# EAGLE board FlashPanelV6_0 (EAGLE 7.3.0)
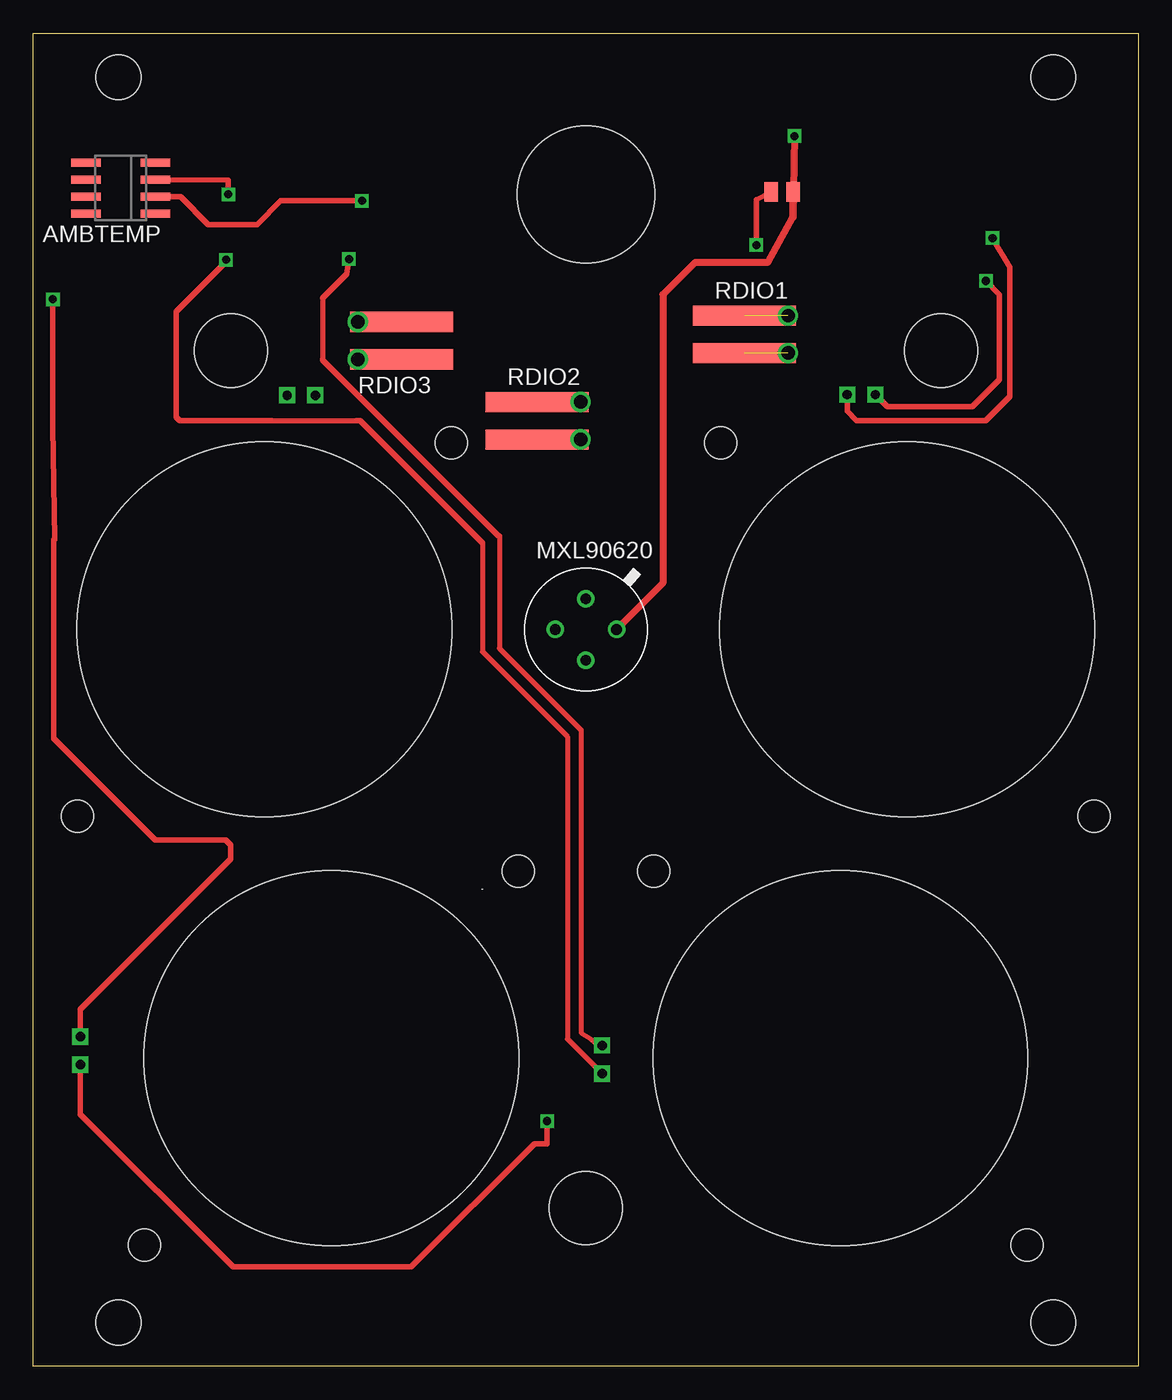
[diagram p0: board, top side]
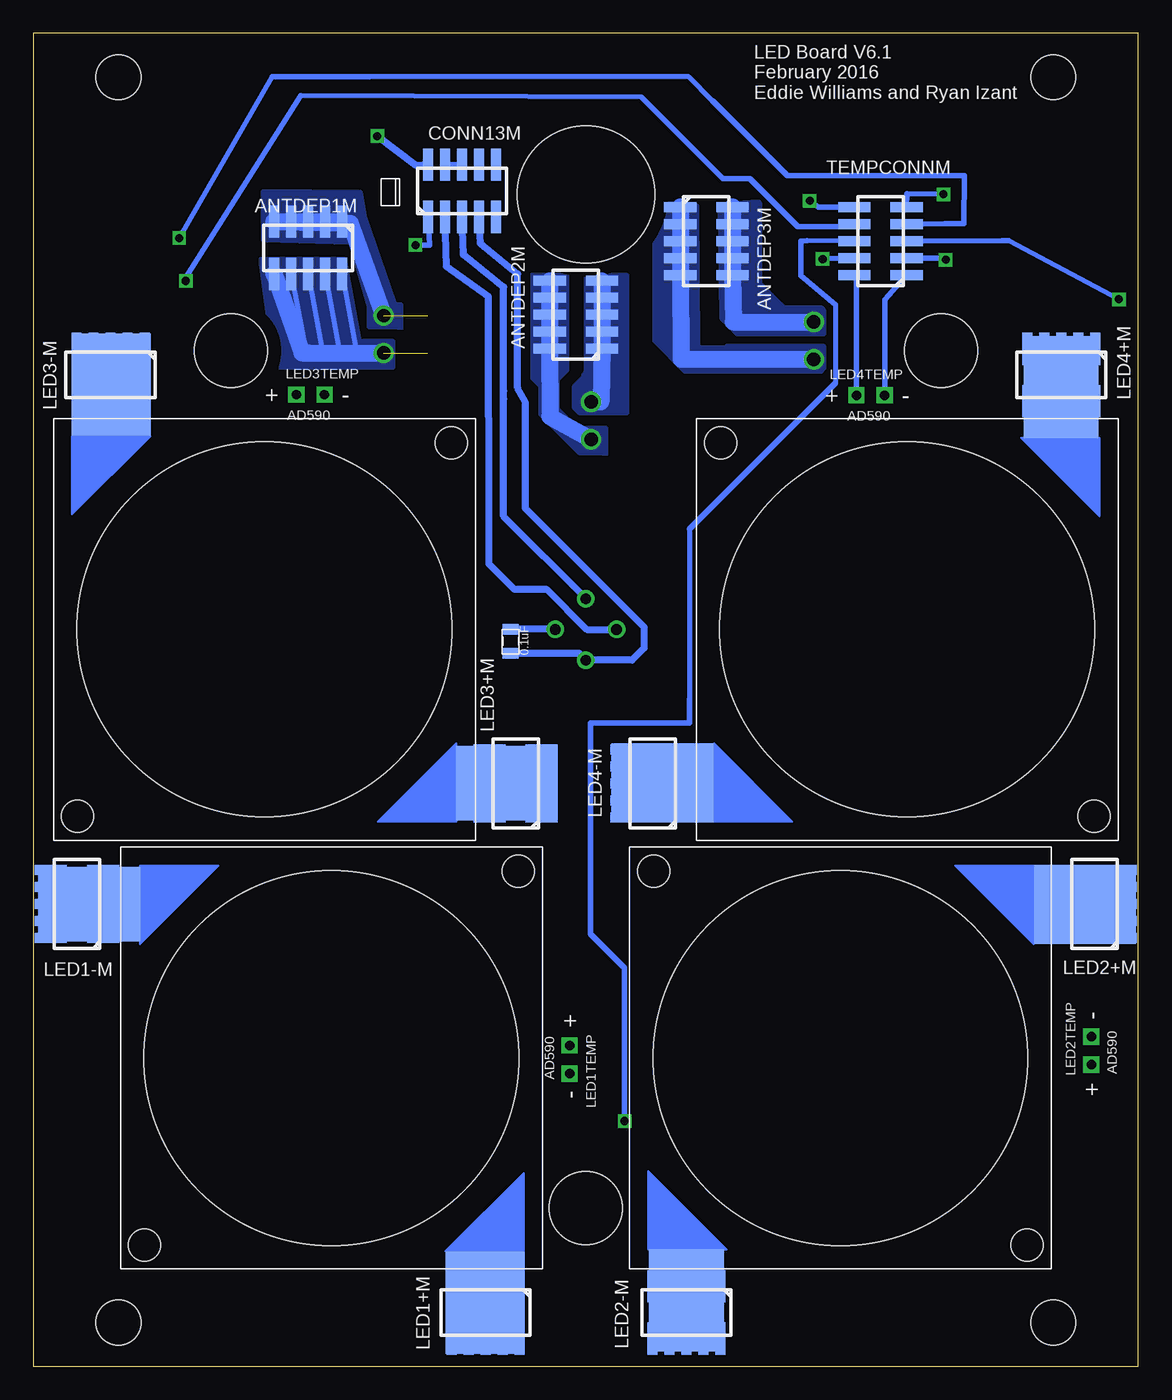
[diagram p1: board, bottom side, seen from below]

Size 82.5 x 99.5 mm. Coordinates in mm from the lower left corner, seen from the top.
Outline: 0,0 0,99.5 82.5,99.5 82.5,0 0,0
Copper layers (1*16): Top 0.035mm / dielectric 1.5mm / Bottom 0.035mm
Design rules "default": minimum track width 10mil, minimum drill 24mil, track to track 8mil, track to pad 8mil, pad to pad 8mil, via to via 8mil, smd to smd 8mil, copper to edge 40mil, drill to drill 8mil, minimum pad ring 10mil, minimum via ring 8mil, stop-mask expansion 4mil, vias tented up to drill 0mil, thermal gap 10mil
Holes 3.35 mm at 76.15,3.25 76.15,96.24 6.35,96.24 6.35,3.25
Holes 5.46 mm at 41.25,11.81 67.77,75.82 14.73,75.82
Holes 10.26 mm at 41.25,87.48

## Footprints (pad centres in the part's own frame; a part is rotated, then mirrored left to right if it is on the bottom)
8SOIC = smd 0.6 x 2.2: 1 -1.905,-2.6; 2 -0.635,-2.6; 3 0.635,-2.6; 4 1.905,-2.6; 5 1.905,2.6; 6 0.635,2.6; 7 -0.635,2.6; 8 -1.905,2.6
10PINMALE = smd 0.74 x 2.4: P1 -2.54,-1.95; P2 -1.27,-1.95; P3 0,-1.95; P4 1.27,-1.95; P5 2.54,-1.95; P6 2.54,1.95; P7 1.27,1.95; P8 0,1.95; P9 -1.27,1.95; P10 -2.54,1.95
0805 = smd 0.8 x 1.2: 1 -0.9,0; 2 0.9,0
CXM27 = smd 7.6 x 5.588: ANODE -18.097,11.481 | smd 5.893 x 7.6: CATHODE 11.455,-18.271 | hole 27.991: 0,0 | hole 2.4: 13.95,13.95; -13.95,-13.95
AD590TH = drill 0.7 square: P$1 -2.1,0; P$2 0,0
RDIO_DPLY = smd 1.5 x 7.714 bottom: P1 -2.8,-3.26; P4 0,-3.26 | drill 1: P2 -2.794,0; P3 0,0
MXL90620 = drill 0.8: SCL 2.293,0; VDD -2.293,0; VSS 0,-2.294 | drill 0.8 pad 1.2: SDA 0,2.294
PHOTODETECTBOTTOM = smd 1 x 1.45 bottom: GND 0.76,0.4; PWROUT -0.88,0.4

## Placement (x,y rotation side)
AMBTEMP  AD590  [8SOIC]  6.52,87.96 90 top
ANTDEP1M  [10PINMALE]  62,83.5 180 bottom
ANTDEP2M  [10PINMALE]  42,78.5 90 bottom
ANTDEP3M  [10PINMALE]  32.25,84 270 bottom
C1  0.1uF  [0805]  46.87,54.11 270 bottom
CONN13M  [10PINMALE]  50.5,87.75 0 bottom
LED1  [CXM27]  60.25,23 0 bottom
LED1+M  [10PINMALE]  48.75,4 180 bottom
LED1-M  [10PINMALE]  79.25,34.5 90 bottom
LED1TEMP  AD590-TH  [AD590TH]  42.46,21.84 270 bottom
LED2  [CXM27]  22.25,23 90 bottom
LED2+M  [10PINMALE]  3.25,34.5 90 bottom
LED2-M  [10PINMALE]  33.75,4 180 bottom
LED2TEMP  AD590-TH  [AD590TH]  3.5,24.6 90 bottom
LED3  [CXM27]  65.25,55 180 bottom
LED3+M  [10PINMALE]  46.5,43.5 90 bottom
LED3-M  [10PINMALE]  76.75,74 180 bottom
LED3TEMP  AD590-TH  [AD590TH]  60.77,72.54 0 bottom
LED4  [CXM27]  17.25,55 270 bottom
LED4+M  [10PINMALE]  5.75,74 180 bottom
LED4-M  [10PINMALE]  36.25,43.5 90 bottom
LED4TEMP  AD590-TH  [AD590TH]  18.94,72.49 0 bottom
RDIO1  RDIO  [RDIO_DPLY]  56.35,78.43 90 bottom
RDIO2  RDIO  [RDIO_DPLY]  40.86,71.99 90 bottom
RDIO3  RDIO  [RDIO_DPLY]  24.23,75.17 270 bottom
TEMPCONNM  [10PINMALE]  19.25,84 90 bottom
U$1  MXL90620  [MXL90620]  41.25,55 90 top
U$2  PHOTODETECTBOTTOM  [PHOTODETECTBOTTOM]  55.96,88.06 180 bottom

## Library data of the parts
AMBTEMP C1 LED1TEMP LED2TEMP LED3TEMP LED4TEMP U$1 = CNTRL_BOARD
ANTDEP1M ANTDEP2M ANTDEP3M CONN13M LED1 LED1+M LED1-M LED2 LED2+M LED2-M LED3 LED3+M LED3-M LED4 LED4+M LED4-M TEMPCONNM = cxm27
RDIO1-RDIO3 = rdio_deploy
U$2 = solarcellnew

## Nets
3V3: C1.2 CONN13M.P4 U$1.VDD
GND: C1.1 CONN13M.P10 U$1.VSS U$2.GND
N$1: LED3+M.P1 LED3+M.P2 LED3+M.P3 LED3+M.P4 LED3+M.P5 LED3+M.P6 LED3+M.P7 LED3+M.P8 LED3+M.P9 LED3+M.P10 LED3.ANODE
N$2: LED3-M.P1 LED3-M.P2 LED3-M.P3 LED3-M.P4 LED3-M.P5 LED3-M.P6 LED3-M.P7 LED3-M.P8 LED3-M.P9 LED3-M.P10 LED3.CATHODE
N$3: LED2+M.P1 LED2+M.P2 LED2+M.P3 LED2+M.P4 LED2+M.P5 LED2+M.P6 LED2+M.P7 LED2+M.P8 LED2+M.P9 LED2+M.P10 LED2.CATHODE
N$4: LED2-M.P1 LED2-M.P2 LED2-M.P3 LED2-M.P4 LED2-M.P5 LED2-M.P6 LED2-M.P7 LED2-M.P8 LED2-M.P9 LED2-M.P10 LED2.ANODE
N$5: LED1+M.P1 LED1+M.P2 LED1+M.P3 LED1+M.P4 LED1+M.P5 LED1+M.P6 LED1+M.P7 LED1+M.P8 LED1+M.P9 LED1+M.P10 LED1.CATHODE
N$6: LED1-M.P1 LED1-M.P2 LED1-M.P3 LED1-M.P4 LED1-M.P5 LED1-M.P6 LED1-M.P7 LED1-M.P8 LED1-M.P9 LED1-M.P10 LED1.ANODE
N$7: LED4-M.P1 LED4-M.P2 LED4-M.P3 LED4-M.P4 LED4-M.P5 LED4-M.P6 LED4-M.P7 LED4-M.P8 LED4-M.P9 LED4-M.P10 LED4.CATHODE
N$8: LED4+M.P1 LED4+M.P2 LED4+M.P3 LED4+M.P4 LED4+M.P5 LED4+M.P6 LED4+M.P7 LED4+M.P8 LED4+M.P9 LED4+M.P10 LED4.ANODE
N$10: ANTDEP1M.P1 ANTDEP1M.P2 ANTDEP1M.P3 ANTDEP1M.P4 ANTDEP1M.P5 RDIO1.P3 RDIO1.P4
N$11: ANTDEP2M.P6 ANTDEP2M.P7 ANTDEP2M.P8 ANTDEP2M.P9 ANTDEP2M.P10 RDIO2.P1 RDIO2.P2
N$12: ANTDEP2M.P1 ANTDEP2M.P2 ANTDEP2M.P3 ANTDEP2M.P4 ANTDEP2M.P5 RDIO2.P3 RDIO2.P4
N$13: ANTDEP3M.P6 ANTDEP3M.P7 ANTDEP3M.P8 ANTDEP3M.P9 ANTDEP3M.P10 RDIO3.P1 RDIO3.P2
N$14: ANTDEP3M.P1 ANTDEP3M.P2 ANTDEP3M.P3 ANTDEP3M.P4 ANTDEP3M.P5 RDIO3.P3 RDIO3.P4
N$15: LED4TEMP.P$2 TEMPCONNM.P1
N$16: LED1TEMP.P$2 TEMPCONNM.P2
N$20: LED2TEMP.P$2 TEMPCONNM.P3
N$21: LED3TEMP.P$2 TEMPCONNM.P4
N$22: LED4TEMP.P$1 TEMPCONNM.P10
N$23: LED1TEMP.P$1 TEMPCONNM.P9
N$24: LED2TEMP.P$1 TEMPCONNM.P8
N$25: LED3TEMP.P$1 TEMPCONNM.P7
N$26: AMBTEMP.3 TEMPCONNM.P5
N$27: AMBTEMP.2 TEMPCONNM.P6
PDOUT: CONN13M.P1 U$2.PWROUT
RDIO1: ANTDEP1M.P6 ANTDEP1M.P7 ANTDEP1M.P8 ANTDEP1M.P9 ANTDEP1M.P10 RDIO1.P1 RDIO1.P2
SCL: CONN13M.P3 U$1.SCL
SDA: CONN13M.P2 U$1.SDA
TEST: CONN13M.P8 CONN13M.P9

## Tracks (layer width: path | path; a pad name or v marks a point on that pad's centre or on a via)
3V3
  Bottom 0.508: CONN13M.P4 49.12,83.82 46.34,81.53 46.34,73.03 45.77,71.96 45.77,64.03 36.9,55.16 36.9,53.6 37.79,52.71 U$1.VDD 41.76,53.21 C1.2
GND  (via drill 0.6)
  Top 0.508: v56.84,91.84 56.72,85.78 U$2.GND 56.72,85.78 54.84,82.4 49.4,82.4 47,80 47,58.46 U$1.VSS
  Bottom 0.508: CONN13M.P10 53.92,89.63 v56.84,91.84 | U$1.VSS 43.56,55.01 C1.1
N$1
  Bottom 0.406: LED3+M.P6 LED3+M.P7 LED3+M.P8 | LED3+M.P8 LED3+M.P9 LED3+M.P10 | LED3+M.P8 LED3+M.P3 | LED3+M.P8 46.67,43.5 46.48,43.69 46.98,43.69 LED3.ANODE | LED3+M.P5 LED3+M.P4 LED3+M.P3 | LED3+M.P3 44.55,43.08 44.96,42.67 44.96,42.64 LED3+M.P2 LED3+M.P1
N$2
  Bottom 0.406: LED3-M.P1 LED3-M.P2 LED3-M.P3 | LED3-M.P3 LED3-M.P4 LED3-M.P5 | LED3-M.P3 76.75,73.32 LED3.CATHODE 76.7,72.09 LED3-M.P8 | LED3-M.P8 LED3-M.P9 LED3-M.P10 | LED3-M.P8 LED3-M.P7 LED3-M.P6
N$3
  Bottom 0.406: LED2+M.P6 LED2+M.P7 LED2+M.P8 | LED2+M.P8 LED2+M.P9 LED2+M.P10 | LED2+M.P8 4.02,34.5 LED2.CATHODE 3.93,34.5 LED2+M.P3 | LED2+M.P5 LED2+M.P4 LED2+M.P3 | LED2+M.P3 LED2+M.P2 LED2+M.P1
N$4
  Bottom 0.406: LED2-M.P5 LED2-M.P4 LED2-M.P3 | LED2-M.P3 LED2-M.P2 LED2-M.P1 | LED2-M.P3 33.75,4.92 LED2.ANODE 33.73,2.07 | 33.73,2.07 LED2-M.P8 LED2-M.P7 LED2-M.P6 | 33.73,2.07 32.5,2.07 LED2-M.P9 LED2-M.P10
N$5
  Bottom 0.406: LED1+M.P6 LED1+M.P7 LED1+M.P8 | LED1+M.P8 48.75,4.68 LED1.CATHODE 48.8,5.91 LED1+M.P3 | 47.73,2.05 LED1+M.P9 LED1+M.P10 | 47.73,2.05 47.75,2.03 | 47.73,2.05 47.5,2.29 47.5,2.03 48.73,2.03 LED1+M.P8 | LED1+M.P3 LED1+M.P2 LED1+M.P1 | LED1+M.P3 LED1+M.P4 LED1+M.P5
N$6
  Bottom 0.406: LED1-M.P1 LED1-M.P2 LED1-M.P3 | LED1-M.P5 LED1-M.P4 LED1-M.P3 | LED1-M.P3 78.33,34.5 LED1.ANODE 81.18,34.48 LED1-M.P8 | LED1-M.P8 LED1-M.P7 LED1-M.P6 | LED1-M.P8 LED1-M.P9 LED1-M.P10
N$7
  Bottom 0.406: LED4-M.P10 LED4-M.P9 LED4-M.P8 | LED4-M.P8 LED4-M.P7 LED4-M.P6 | LED4-M.P8 36.64,43.5 36.58,43.43 35.81,43.43 | 35.81,43.43 35.63,43.43 | 35.63,43.43 LED4.CATHODE 35.7,43.55 35.81,43.43 | 35.63,43.43 35.31,43.43 35.05,43.69 34.49,43.69 LED4-M.P3 | LED4-M.P3 LED4-M.P4 LED4-M.P5 | LED4-M.P3 LED4-M.P2 LED4-M.P1
N$8
  Bottom 0.406: LED4+M.P5 LED4+M.P4 LED4+M.P3 | LED4+M.P3 LED4+M.P2 LED4+M.P1 | LED4+M.P3 5.75,74.26 5.84,74.17 5.84,73.17 LED4.ANODE 5.77,72.07 LED4+M.P8 | LED4+M.P8 LED4+M.P7 LED4+M.P6 | LED4+M.P8 LED4+M.P9 LED4+M.P10
N$10  (1 unrouted)
  Bottom 1.27: RDIO1.P3 58.85,85.33 ANTDEP1M.P5 ANTDEP1M.P4 ANTDEP1M.P3 ANTDEP1M.P2 ANTDEP1M.P1
  pour Bottom (no thermals): 65.3,84.1 65.3,87.7 58.1,87.6 57.8,85.9 57.8,85.8 55.6,79.4 55.4,79.2 55.1,79.2 55.1,77.5 55.2,77.6 57.4,77.6 57.4,79.1 58.8,83.9
N$11
  Top 0.406: RDIO2.P2 RDIO2.P1
  Bottom 1.27: ANTDEP2M.P6 ANTDEP2M.P7 ANTDEP2M.P8 ANTDEP2M.P9 ANTDEP2M.P10 43.93,70.9 RDIO2.P2
  pour Bottom (no thermals): 42.7,81.3 42.7,74.4 43.4,73.7 43.4,72.6 43.4,71.4 42,70 39.8,70 39.8,68.1 39.9,68.2 41.7,68.2 44.6,71.1 44.6,73.2 45.2,73.8 45.2,81.5 45.1,81.4 42.6,81.4
N$12
  Top 0.406: RDIO2.P4 RDIO2.P3
  Bottom 1.27: ANTDEP2M.P5 ANTDEP2M.P4 ANTDEP2M.P3 ANTDEP2M.P2 ANTDEP2M.P1 40.13,71.99 RDIO2.P3
  pour Bottom (no thermals): 38.2,81.4 38.2,71.2 41.7,71.2 42.1,71.6 42.1,73.1 41.4,73.8 41.4,74 41.2,74.2 41.2,81.5 41.1,81.4
N$13
  Top 0.406: RDIO3.P2 RDIO3.P1
  Bottom 1.27: ANTDEP3M.P10 ANTDEP3M.P9 ANTDEP3M.P8 ANTDEP3M.P7 ANTDEP3M.P6 30.24,77.96 RDIO3.P2
  pour Bottom (no thermals): 31.1,78.3 29.9,77.1 23.5,77.1 23.5,78.8 23.7,79 26.5,79 28.3,80.8 28.3,86.8 28.4,86.9 31.2,86.7 31.2,86.5
N$14
  Top 0.406: RDIO3.P3 24.23,75 24,75 24,75.17 RDIO3.P4
  Bottom 1.27: ANTDEP3M.P1 ANTDEP3M.P2 ANTDEP3M.P3 ANTDEP3M.P4 ANTDEP3M.P5 34.14,75.17 RDIO3.P3
  pour Bottom (no thermals): 32.9,76.2 32.7,76 30.8,76 30.7,76.1 23.5,76.1 23.5,74.5 23.7,74.3 33.8,74.3 36.1,76.6 36.1,84.2 35.2,86.8 33,86.6
N$15
  Bottom 0.406: LED4TEMP.P$2 18.94,79.64 TEMPCONNM.P1
N$16  (via drill 0.6)
  Top 0.381: 17.78,70.61 24.13,70.61 | 33.53,61.47 33.53,53.34 39.88,46.99 39.88,24.42 LED1TEMP.P$2
  Top 0.406: 17.78,70.61 10.92,70.61 10.67,70.87 10.67,78.74 14.22,82.3 v14.38,82.6 | 24.13,70.61 24.38,70.61 33.53,61.47
  Bottom 0.406: TEMPCONNM.P2 14.31,82.71 v14.38,82.6
N$20  (via drill 0.6)
  Top 0.406: v1.45,79.66 1.45,70.15 1.58,61.72 1.52,61.72 1.52,46.88 9.1,39.3 14.33,39.3 14.73,38.9 14.73,37.85 3.5,26.61 LED2TEMP.P$2
  Bottom 0.406: v1.45,79.66 9.65,84.02 10.14,84.04 TEMPCONNM.P3
N$21  (via drill 0.6)
  Top 0.406: LED3TEMP.P$2 60.77,71.31 61.47,70.61 71.12,70.61 72.9,72.39 72.9,82.04 v71.62,84.22
  Bottom 0.381: 31.78,94.49 33.56,96.27 57.4,96.27
  Bottom 0.406: 57.4,96.27 64.67,96.27 v71.62,84.22 | TEMPCONNM.P4 14.45,85.31 13.03,85.29 13.01,88.89 14.73,88.9 26.19,88.9 31.78,94.49
N$22
  Bottom 0.406: LED4TEMP.P$1 21.04,81.17 TEMPCONNM.P10
N$23  (via drill 0.6)
  Top 0.381: 21.59,79.76 21.59,75.18 | 34.8,61.98 34.8,53.59 40.89,47.5 40.89,24.89 41.66,24.38 42.31,23.88 LED1TEMP.P$1
  Top 0.406: v23.57,82.65 23.37,81.53 21.59,79.76 | 21.59,75.18 21.59,75.11 22.95,73.75 23.5,73.2 34.72,61.98 34.8,61.98
  Bottom 0.406: TEMPCONNM.P9 23.14,82.67 v23.57,82.65
N$24  (via drill 0.6)
  Top 0.406: v38.35,18.29 38.35,16.6 37.4,16.6 28.2,7.4 14.9,7.4 3.5,18.8 LED2TEMP.P$1
  Bottom 0.381: TEMPCONNM.P8 24.76,84.02 | 22.61,79.25 22.61,73.41 | 33.53,62.48 33.53,49.78
  Bottom 0.406: 33.53,49.78 33.53,48.01 40.89,48.01 40.89,32.26 38.35,29.72 v38.35,18.29 | 22.61,79.25 25.19,81.43 25.19,84 24.76,84.02 | 33.53,62.48 22.61,73.41
N$25  (via drill 0.6)
  Top 0.406: v71.12,81.03 72.14,80.01 72.14,73.66 70.1,71.63 63.78,71.63 LED3TEMP.P$1
  Bottom 0.381: 31.01,88.67 37.08,94.74 62.56,94.84
  Bottom 0.406: 62.56,94.84 71.12,81.28 v71.12,81.03 | 31.01,88.67 29,88.67 25.42,85.09 21.2,85.09 TEMPCONNM.P7
N$26  (via drill 0.6)
  Top 0.406: v14.54,87.5 14.54,88.54 AMBTEMP.3
  Bottom 0.406: TEMPCONNM.P5 17.28,87.53 v14.54,87.5
N$27  (via drill 0.6)
  Top 0.406: v24.52,87.01 18.47,87.01 16.7,85.24 13.06,85.24 11,87.3 9.14,87.3 AMBTEMP.2
  Bottom 0.406: TEMPCONNM.P6 23.9,86.52 v24.52,87.01
PDOUT  (via drill 0.6)
  Top 0.406: U$2.PWROUT 53.98,87.1 v53.98,83.7
  Bottom 0.406: v53.98,83.7 52.93,83.7 CONN13M.P1
RDIO1  (1 unrouted)
  Bottom 0.381: ANTDEP1M.P10 58.38,75.67 58.42,75.64 | ANTDEP1M.P9 59.65,75.67 59.69,75.64 | ANTDEP1M.P8 60.92,75.67 60.96,75.64 | ANTDEP1M.P7 62.19,75.86 61.98,75.64
  Bottom 1.27: ANTDEP1M.P6 62.45,75.64 61.98,75.64 60.96,75.64 59.69,75.64 58.42,75.64 RDIO1.P2
  pour Bottom (no thermals): 64.4,74.6 55.7,74.6 55.7,76.5 58.2,76.5 59.3,82.6 65.5,82.6
SCL
  Bottom 0.508: CONN13M.P3 50.39,82.98 47.38,80.57 47.38,72.8 47.4,72.21 47.4,63.44 U$1.SCL
SDA
  Bottom 0.508: CONN13M.P2 51.66,82.09 48.53,79.86 48.53,71.3 48.49,70.36 48.49,59.89 46.6,58 44.2,58 41.2,55 U$1.SDA
TEST
  Bottom 0.406: CONN13M.P9 CONN13M.P8

## Text on the board
bNames: LED Board V6.1 / February 2016 / Eddie Williams and Ryan Izant
tDocu: EquiSat | Brown CubeSat Team